# EAGLE board dice (EAGLE 7.7.0)
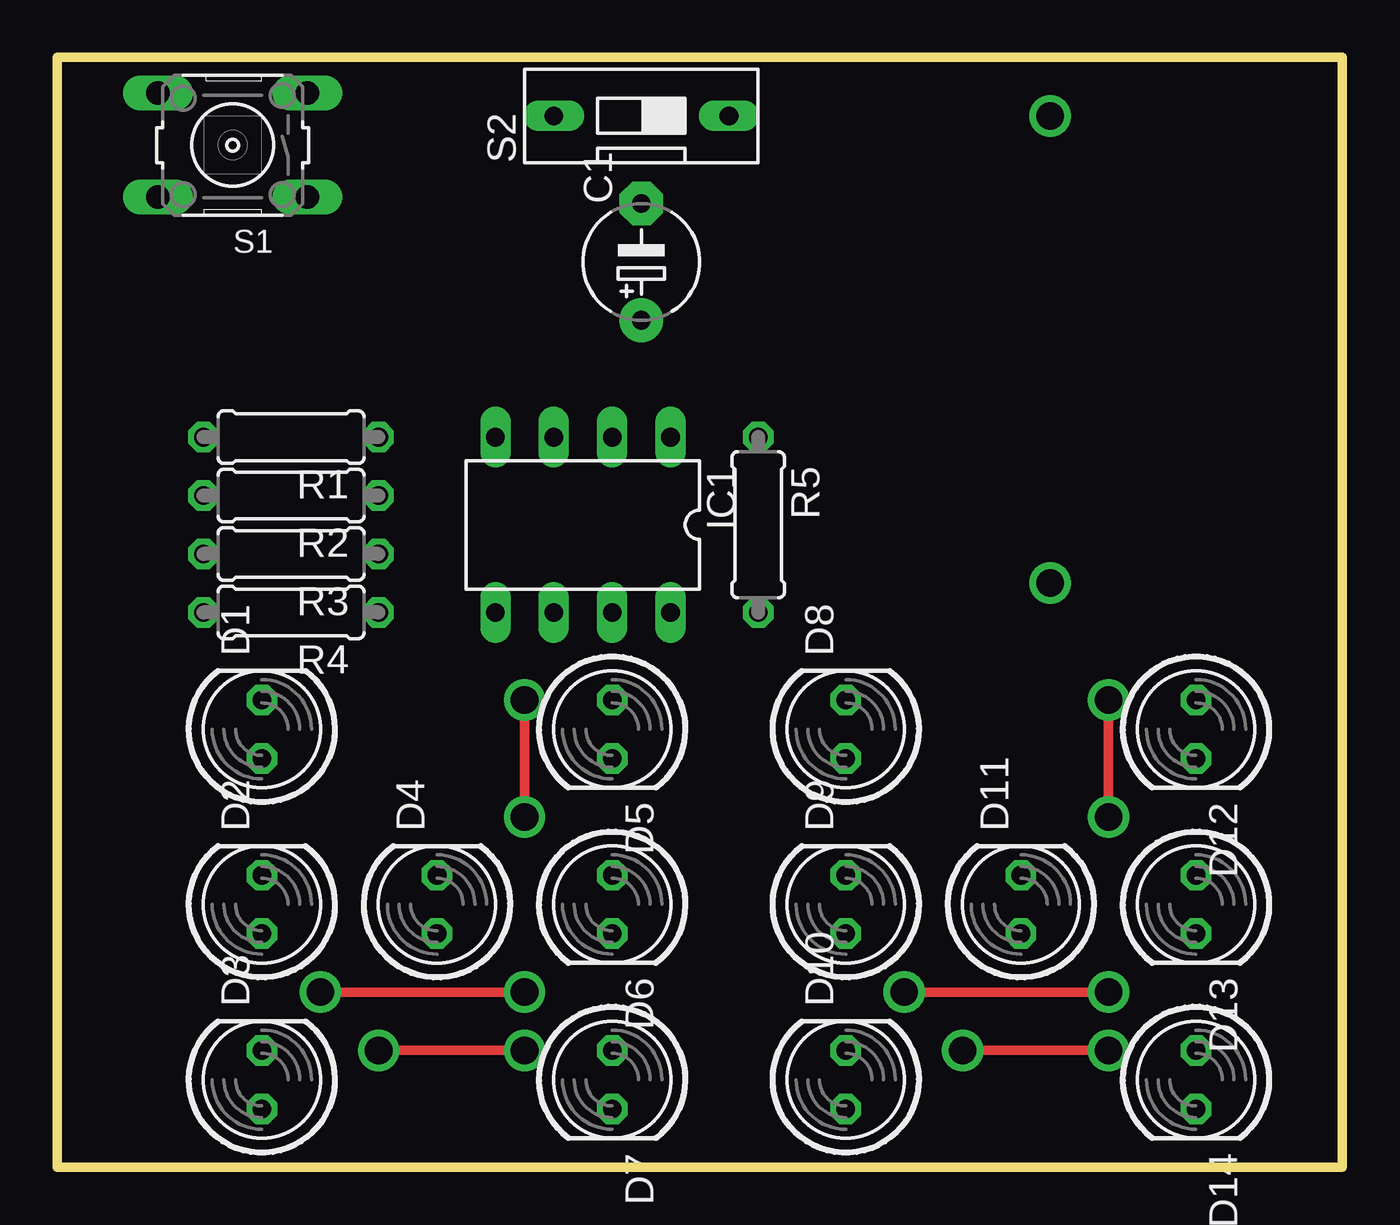
[diagram p0: board, top side]
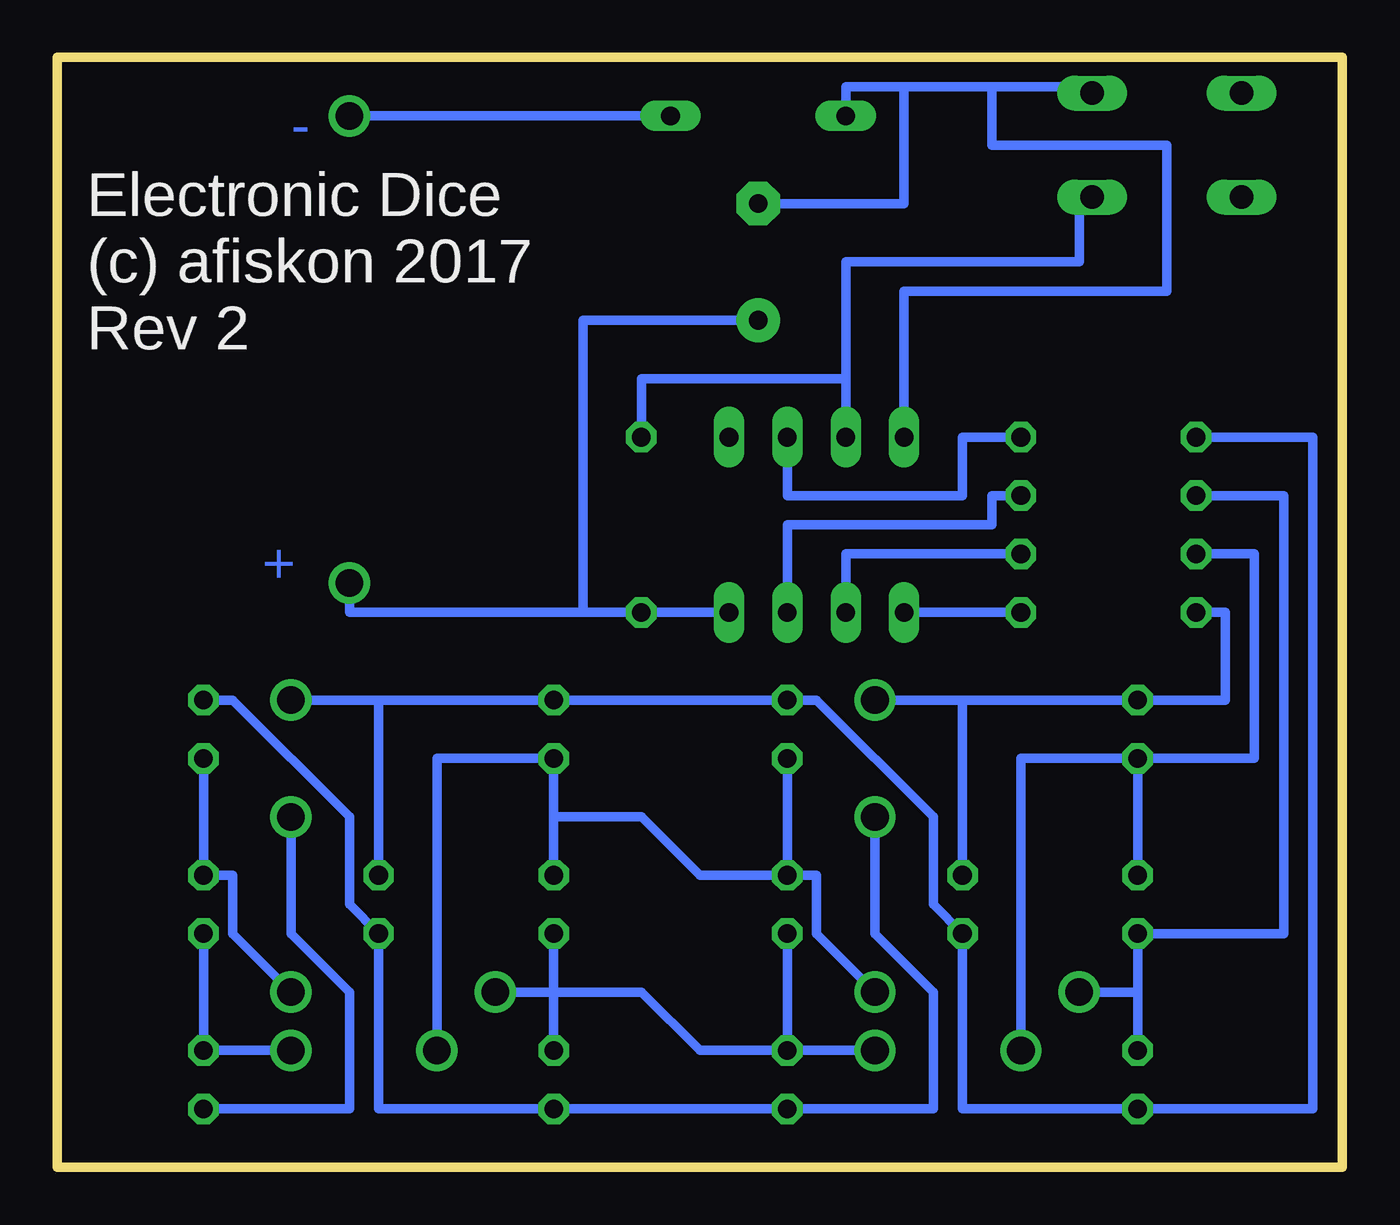
[diagram p1: board, bottom side, seen from below]

Size 55.88 x 48.26 mm. Coordinates in mm from the lower left corner, seen from the top.
Outline: 41.91,0 0,0 0,48.26 55.88,48.26 55.88,0 30.48,0
Copper layers (1*16): Top 0.035mm / dielectric 1.5mm / Bottom 0.035mm
Design rules "default": minimum track width 10mil, minimum drill 24mil, track to track 8mil, track to pad 8mil, pad to pad 8mil, via to via 8mil, smd to smd 8mil, copper to edge 40mil, drill to drill 8mil, minimum pad ring 10mil, minimum via ring 8mil, stop-mask expansion 4mil, vias tented up to drill 0mil, thermal gap 10mil

## Footprints (pad centres in the part's own frame; a part is rotated, then mirrored left to right if it is on the bottom)
E5-5 = drill 0.813 pad 1.905: + -2.54,0 | drill 0.813 pad 1.905 octagon: - 2.54,0
LED5MM = drill 0.813 octagon: A -1.27,0; K 1.27,0
DIL08 = drill 0.813 long: 1 -3.81,-3.81; 2 -1.27,-3.81; 3 1.27,-3.81; 4 3.81,-3.81; 5 3.81,3.81; 6 1.27,3.81; 7 -1.27,3.81; 8 -3.81,3.81
0207/7 = drill 0.813 octagon: 1 -3.81,0; 2 3.81,0
B3F-10XX = drill 1.016 long: 1 -3.251,2.261; 2 3.251,2.261; 3 -3.251,-2.261; 4 3.251,-2.261
DS-01 = drill 0.813 long: 1 0,-3.81; 2 0,3.81

## Placement (x,y rotation side)
C1  [E5-5]  25.4,39.37 90 top
D1  [LED5MM]  8.89,19.05 90 top
D2  [LED5MM]  8.89,11.43 90 top
D3  [LED5MM]  8.89,3.81 90 top
D4  [LED5MM]  16.51,11.43 90 top
D5  [LED5MM]  24.13,19.05 270 top
D6  [LED5MM]  24.13,11.43 270 top
D7  [LED5MM]  24.13,3.81 270 top
D8  [LED5MM]  34.29,19.05 90 top
D9  [LED5MM]  34.29,11.43 90 top
D10  [LED5MM]  34.29,3.81 90 top
D11  [LED5MM]  41.91,11.43 90 top
D12  [LED5MM]  49.53,19.05 270 top
D13  [LED5MM]  49.53,11.43 270 top
D14  [LED5MM]  49.53,3.81 270 top
IC1  [DIL08]  22.86,27.94 180 top
R1  [0207/7]  10.16,31.75 180 top
R2  [0207/7]  10.16,29.21 180 top
R3  [0207/7]  10.16,26.67 180 top
R4  [0207/7]  10.16,24.13 180 top
R5  [0207/7]  30.48,27.94 270 top
S1  [B3F-10XX]  7.62,44.45 180 top
S2  [DS-01]  25.4,45.72 90 top

## Library data of the parts
C1 R1-R5 = rcl
D1-D14 = led
IC1 = atmel
S1 = buttons
S2 = switch-dil

## Nets
S$1: D2.A D3.K D5.K D6.A D8.A D9.K D13.K D14.A R2.2
S$2: D1.A D2.K D6.K D7.A D9.A D10.K D12.K D13.A R3.2
S$3: IC1.5 R4.1
S$4: C1.- IC1.4 S2.2
S$5: IC1.6 R3.1
S$6: IC1.7 R2.1
S$7: D3.A D4.A D5.A D11.K D14.K R1.2
S$8: C1.+ D4.K D7.K D10.A D11.A D12.A IC1.8 R4.2 R5.2 S2.1
S$9: IC1.2 R1.1
S$10: IC1.3 R5.1

## Tracks (layer width: path | path; a pad name or v marks a point on that pad's centre or on a via)
S$1  (via drill 1.2)
  Top 0.406: v20.32,7.62 v11.43,7.62 | v39.37,5.08 v45.72,5.08
  Bottom 0.406: v11.43,7.62 8.89,7.62 | R2.2 2.54,29.21 2.54,10.16 D2.A 8.89,7.62 | D3.K 8.89,7.62 | v20.32,7.62 22.86,10.16 22.86,12.7 D6.A | D6.A 27.94,12.7 30.48,15.24 34.29,15.24 | D6.A D5.K | v39.37,5.08 39.37,17.78 D8.A 34.29,15.24 | D9.K 34.29,15.24 | v45.72,5.08 D14.A D13.K
S$2  (via drill 1.2)
  Top 0.406: v13.97,5.08 v20.32,5.08 | v45.72,7.62 v36.83,7.62
  Bottom 0.406: v13.97,5.08 13.97,17.78 D1.A | R3.2 3.81,26.67 3.81,17.78 D1.A | D2.K D1.A | v20.32,5.08 D7.A | D7.A 27.94,5.08 30.48,7.62 34.29,7.62 | D7.A D6.K | v36.83,7.62 34.29,7.62 | 34.29,7.62 D9.A | D10.K 34.29,7.62 | v45.72,7.62 48.26,10.16 48.26,12.7 D13.A D12.K
S$3
  Bottom 0.406: IC1.5 R4.1
S$4
  Bottom 0.406: C1.- 19.05,41.91 19.05,46.99 | IC1.4 19.05,38.1 7.62,38.1 7.62,44.45 15.24,44.45 15.24,46.99 | 11.43,46.99 15.24,46.99 | 15.24,46.99 19.05,46.99 | 19.05,46.99 21.59,46.99 S2.2
S$5
  Bottom 0.406: R3.1 21.59,26.67 IC1.6
S$6
  Bottom 0.406: IC1.7 24.13,27.94 15.24,27.94 15.24,29.21 R2.1
S$7  (via drill 1.2)
  Top 0.406: v45.72,15.24 v45.72,20.32
  Bottom 0.406: v45.72,15.24 45.72,10.16 43.18,7.62 43.18,2.54 D14.K | D11.K 41.91,20.32 | v45.72,20.32 41.91,20.32 | R1.2 1.27,31.75 1.27,2.54 D3.A 16.51,2.54 D4.A 17.78,11.43 17.78,15.24 22.86,20.32 D5.A 41.91,20.32
S$8  (via drill 1.2)
  Top 0.406: v20.32,15.24 v20.32,20.32
  Bottom 0.406: C1.+ 33.02,36.83 33.02,24.13 | IC1.8 R5.2 33.02,24.13 | 33.02,24.13 43.18,24.13 v43.18,25.4 | D12.A 48.26,20.32 43.18,15.24 43.18,11.43 D11.A 41.91,2.54 D10.A D7.K 17.78,2.54 17.78,7.62 20.32,10.16 v20.32,15.24 | R4.2 5.08,24.13 5.08,20.32 16.51,20.32 | D4.K 16.51,20.32 | v20.32,20.32 16.51,20.32 | v43.18,45.72 S2.1
S$9
  Bottom 0.406: R1.1 16.51,31.75 16.51,29.21 24.13,29.21 IC1.2
S$10
  Bottom 0.406: IC1.3 21.59,34.29 | 21.59,34.29 30.48,34.29 R5.1 | 21.59,34.29 21.59,39.37 11.43,39.37 11.43,41.91

## Text on the board
Bottom: - | +
bNames: Electronic Dice / (c) afiskon 2017 / Rev 2